# Altium PCB RobotCtrl_Core.PcbDoc
Units mm, origin at the board's own origin, x right, y up, seen from the top; angles counter-clockwise.
Board outline 47.75 x 39.24 mm, 4 copper layers (Top Layer, Layer 2, GND2, Bottom Layer), stack 0.603 mm thick; 48 components, 126 nets, 368 pads, 30 vias.
Unrouted connection lines stored in the file: 237.
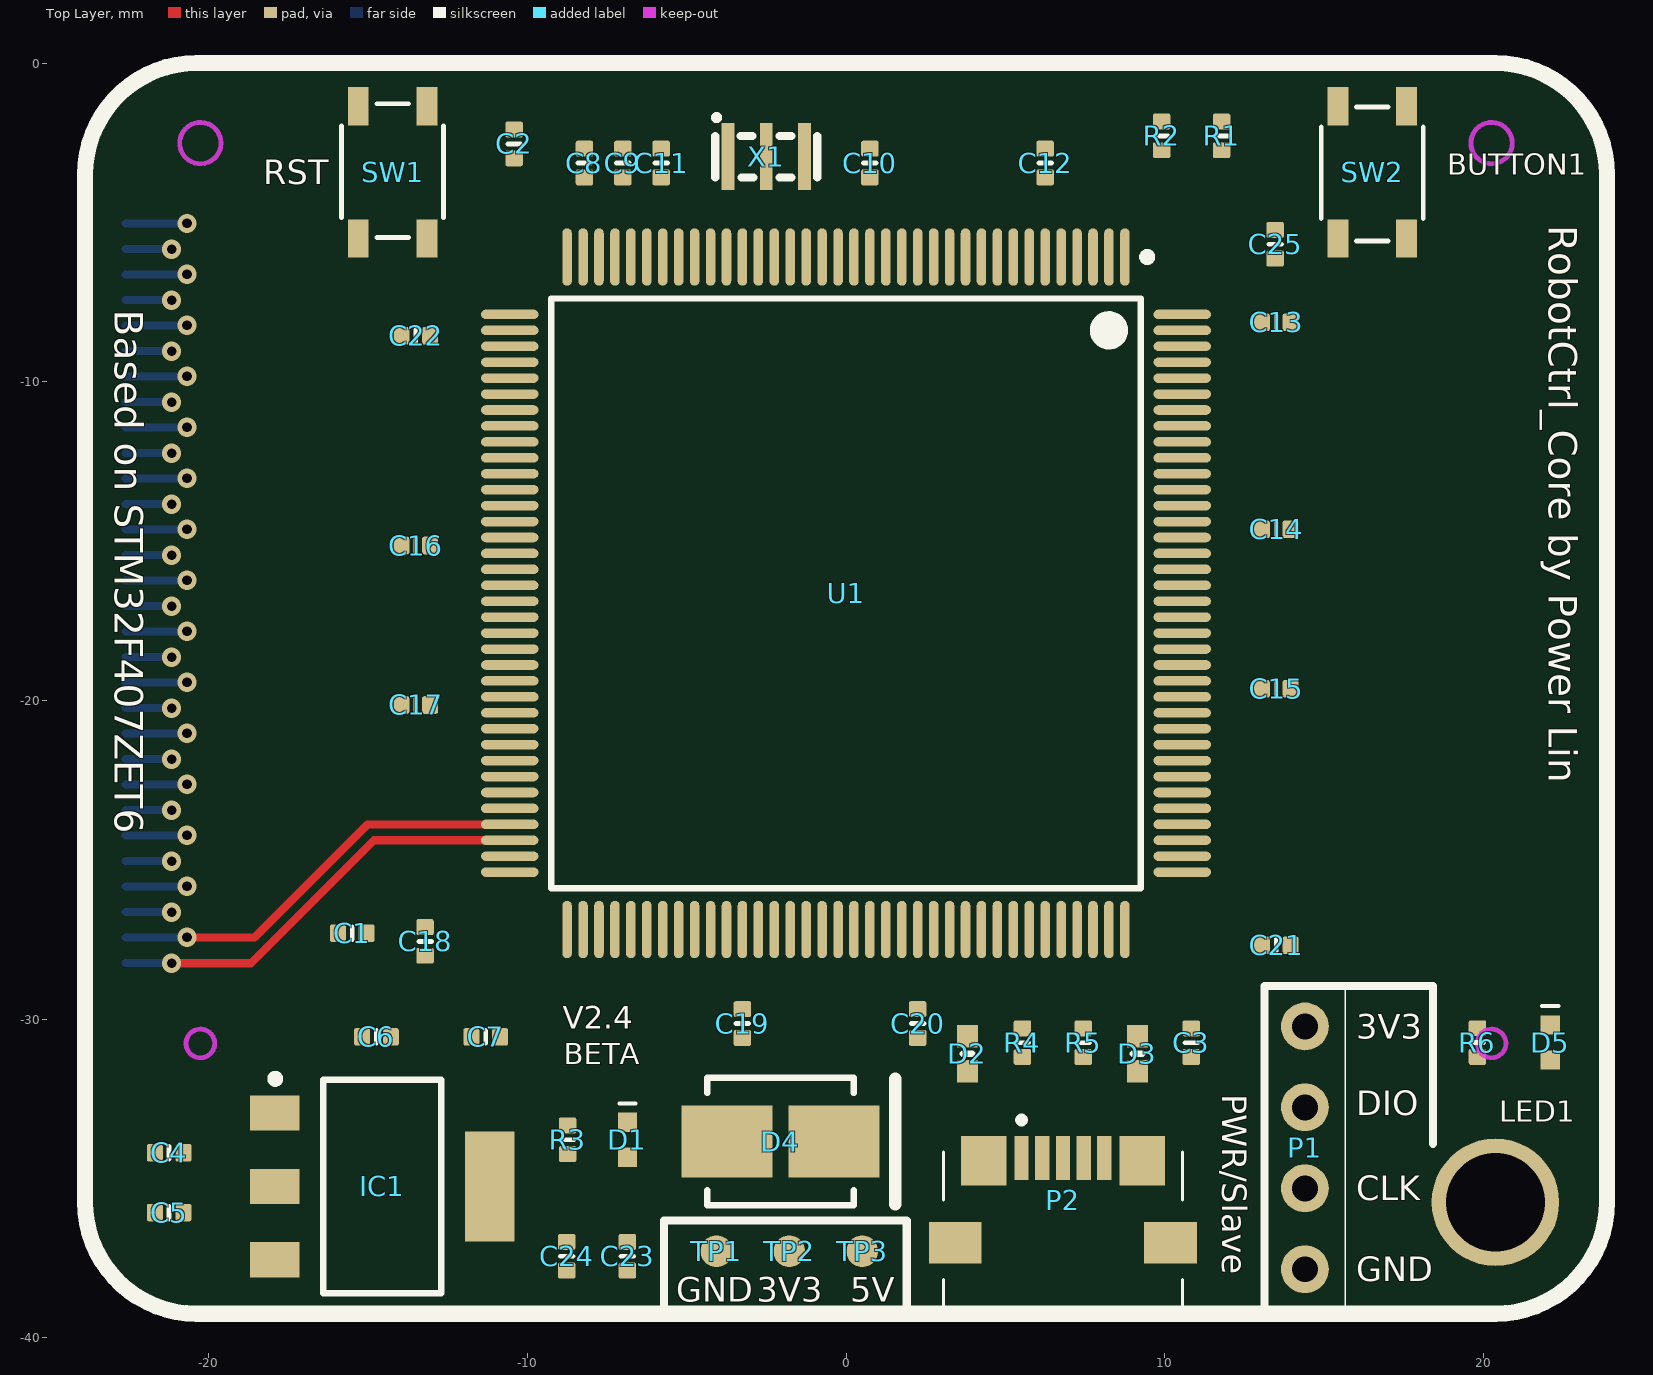
[diagram p0: Top Layer view]
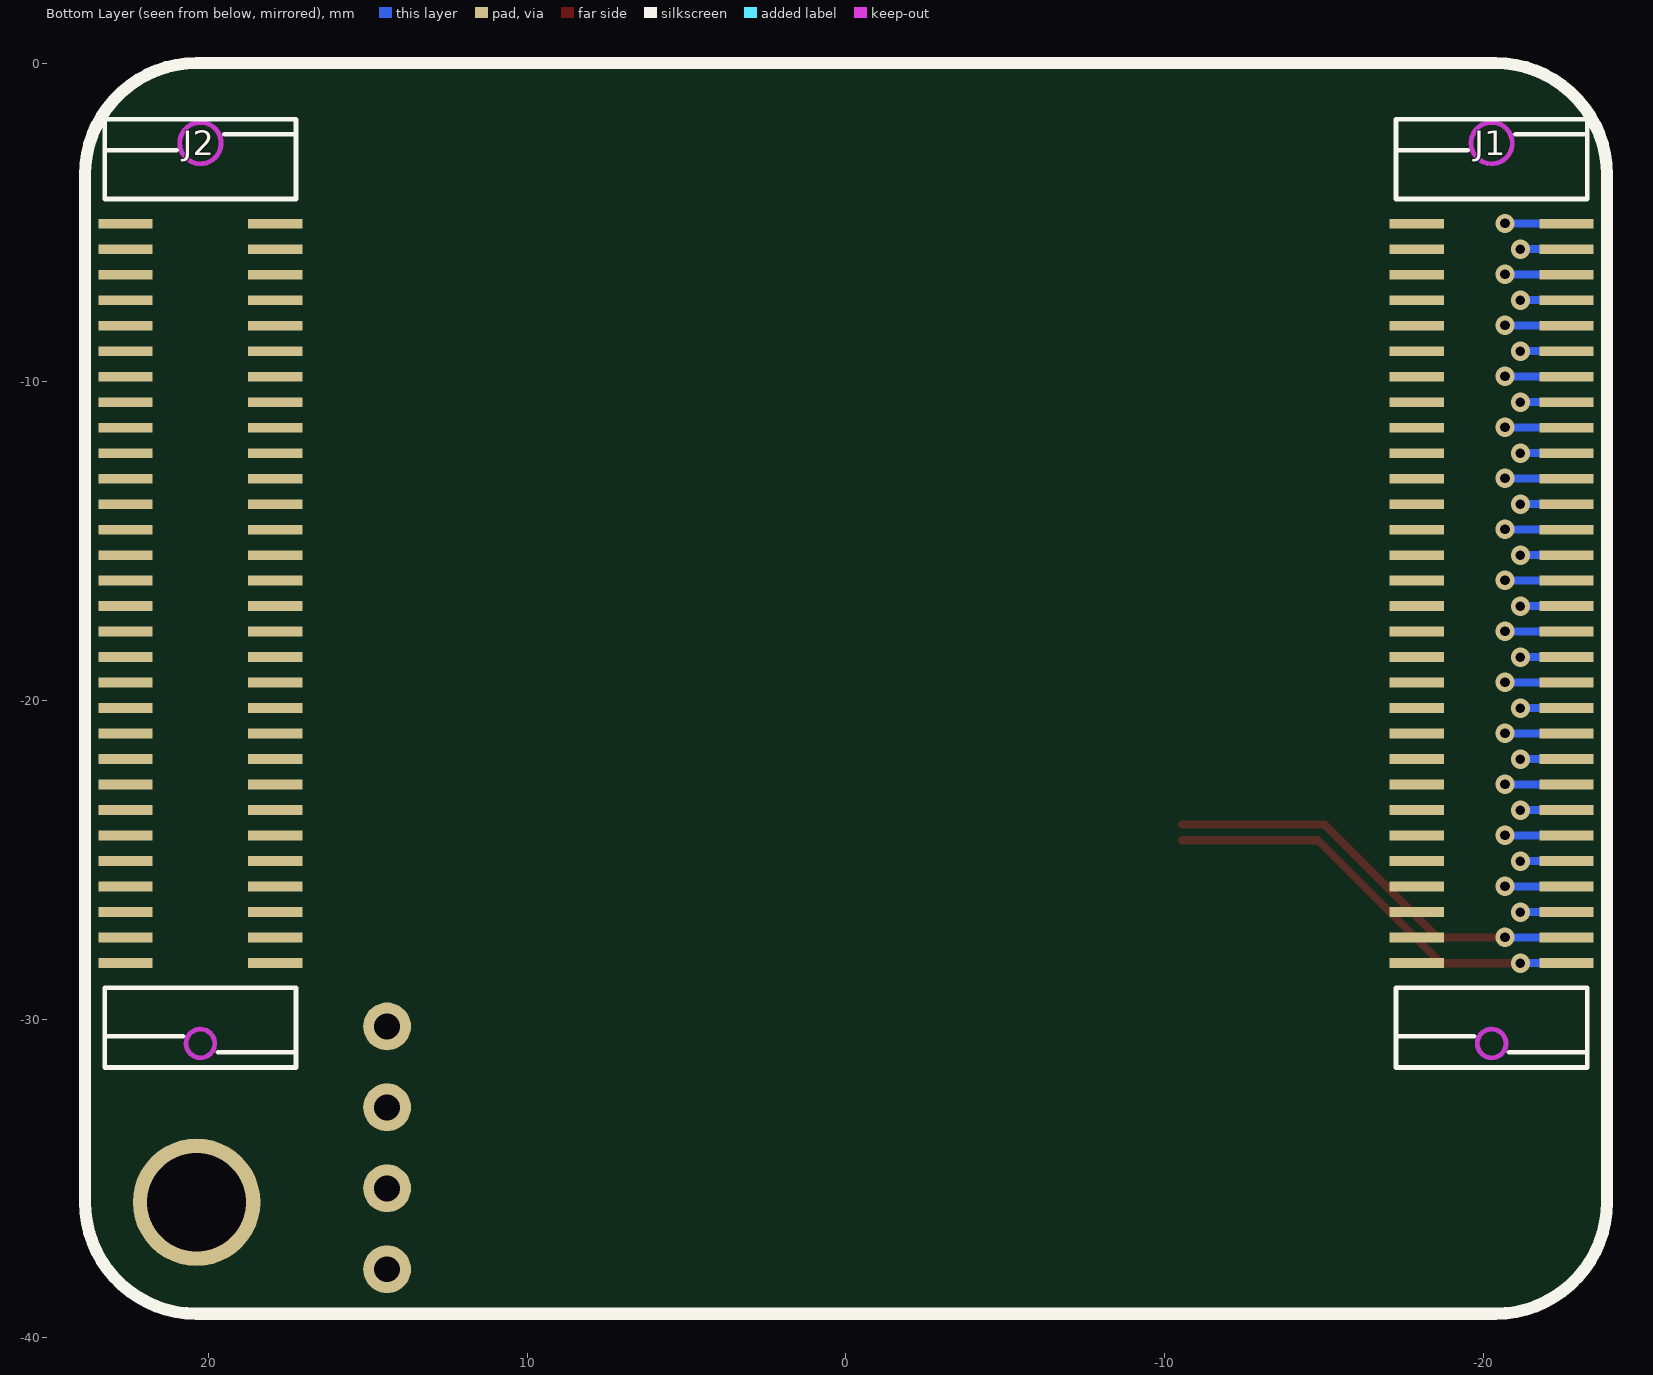
[diagram p1: Bottom Layer view, seen from below]

## Layer stack, top to bottom
Top Solder: solder mask 0.0102, Solder Resist, Dk 3.5
Top Layer: signal copper 0.0356
Dielectric 2: prepreg 0.0711, PP-006, Dk 4.1
Layer 2: signal copper 0.035
Dielectric 1: dielectric 0.32, FR-4, Dk 4.8
GND2: signal copper 0.035
Dielectric 3: prepreg 0.0711, PP-006, Dk 4.1
Bottom Layer: signal copper 0.0356
Bottom Solder: solder mask 0.0102, Solder Resist, Dk 3.5

## Board outline
-20.376,-39.243 cw(c-20.376,-35.743) -23.876,-35.743 -23.876,-3.5 cw(c-20.376,-3.5) -20.376,0 20.376,0 cw(c20.376,-3.5) 23.876,-3.5 23.876,-35.743 cw(c20.376,-35.743) 20.376,-39.243

## Design rules (kind name [scope] priority, off if disabled: settings)
Clearance [All] p1: gap=0.254 ignorepadtopadclearanceinfootprint=FALSE except(0: Arc-Hole Track-Hole SMDPad-Hole THPad-Hole Via-Hole Fill-Hole Poly-Hole Region-Hole Text-Hole; 0.051: Arc-SMDPad Track-SMDPad SMDPad-SMDPad; 0.244: Arc-Arc Arc-Track Track-Track)
PlaneConnect [All] p1: planeconnectstyle=Direct reliefexpansion=0.508 reliefentries=4 reliefconductorwidth=0.254 reliefairgap=0.254
PolygonConnect [All] p1: connectstyle=Direct reliefconductorwidth=0.254 reliefentries=4 polygonreliefangle="90 Angle" airgapwidth=0.254
RoutingVias [All] p1: holewidth=0.3 width=0.6 viastyle="Through Hole" minholewidth=0.3 minwidth=0.6 maxholewidth=0.3 maxwidth=0.6
SolderMaskExpansion [All] p1: expansion=0.102 istentingtop=FALSE
Width [All] p1: maxlimit=2.54 minlimit=0.152 preferedwidth=0.254
29 further rules are at their usual default settings.

## Components (designator, comment, footprint, x,y, rotation, side; value= is the part's Value field where it differs from the comment)
C1 "2.2uF@16V" CAP-0402 -15.494,-27.305 r0 top
C2 "100nF@16V" CAP-0402 -10.414,-2.54 r90 top
C3 "2.2uF@16V" CAP-0402 10.834,-30.737 r270 top
C4 "10uF@10V" CAP-0402 -21.237,-34.191 r0 top
C5 "100nF@16V" CAP-0402 -21.237,-36.068 r0 top
C6 "100nF@16V" CAP-0402 -14.732,-30.556 r0 top
C7 "10uF@10V" CAP-0402 -11.303,-30.556 r180 top
C8 "1uF@16V" CAP-0402 -8.206,-3.138 r270 top
C9 "100nF@16V" CAP-0402 -7.001,-3.138 r270 top
C10 "10uF@10V" CAP-0402 0.75,-3.138 r270 top
C11 "100nF@16V" CAP-0402 -5.797,-3.138 r270 top
C12 "100nF@16V" CAP-0402 6.25,-3.138 r270 top
C13 "100nF@16V" CAP-0402 13.499,-8.136 r180 top
C14 "100nF@16V" CAP-0402 13.499,-14.63 r180 top
C15 "100nF@16V" CAP-0402 13.499,-19.634 r180 top
C16 "100nF@16V" CAP-0402 -13.499,-15.138 r0 top
C17 "100nF@16V" CAP-0402 -13.499,-20.142 r0 top
C18 "100nF@16V" CAP-0402 -13.208,-27.559 r90 top
C19 "100nF@16V" CAP-0402 -3.25,-30.136 r90 top
C20 "100nF@16V" CAP-0402 2.25,-30.136 r90 top
C21 "100nF@16V" CAP-0402 13.499,-27.686 r180 top
C22 "100nF@16V" CAP-0402 -13.499,-8.56 r0 top
C23 "10uF@10V" CAP-0402 -6.858,-37.437 r270 top
C24 "100nF@16V" CAP-0402 -8.763,-37.437 r270 top
C25 "100nF@16V" CAP-0402 13.462,-5.687 r270 top
D1 "RED" LED-0402 -6.858,-33.782 r90 top
D2 "PESD0402-140" D-0402 3.81,-31.084 r90 top
D3 "PESD0402-140" D-0402 9.144,-31.084 r90 top
D4 "SMBJ5.0CA" DO-214AA/SMB -2.056,-33.84 r180 top
D5 "RED" LED-0402 22.098,-30.734 r90 top
IC1 "AMS1117-3.3" SOT-223 -14.732,-35.857 r270 top
J1 "3710M060037G3FT01" 3710M060037G3FT01 -17.906,-28.237 r0 bottom locked
J2 "3710M060037G3FT01" 3710M060037G3FT01 22.606,-28.237 r0 bottom locked
P1 "HDR1x4_2.54" HDR1X4_2.54 14.4,-37.846 r180 top
P2 "MicroQTJ" USB-MICRO 6.807,-36.328 r0 top
R1 "10k" R-0402 11.783,-2.286 r270 top
R2 "120R" R-0402 9.906,-2.286 r270 top
R3 "4.7k" R-0402 -8.735,-33.782 r90 top
R4 "10R" R-0402 5.537,-30.737 r270 top
R5 "10R" R-0402 7.442,-30.737 r270 top
R6 "4.7k" R-0402 19.812,-30.734 r90 top
SW1 "KEY" KEY-4P-4.2*3.4*2.5 -14.224,-3.429 r270 top
SW2 "KEY" KEY-4P-4.2*3.4*2.5 16.51,-3.429 r90 top
TP1 "TestPoint" TestPoint -4.064,-37.28 r90 top
TP2 "TestPoint" TestPoint -1.778,-37.28 r90 top
TP3 "TestPoint" TestPoint 0.508,-37.28 r90 top
U1 "STM32F407ZET6" STM-LQFP144_N 0,-16.637 r270 top locked
X1 "8MHz" SMD3213-3P -2.502,-2.939 r0 top

## Footprints (in the part's own frame and the unit in brackets; to place one, negate y for a bottom-side part, rotate by r counter-clockwise, add the part's x,y. Pads: shape width x height; smd on the part's side, far side on the other; paste and mask are expansions set on the pad)
3710M060037G3FT01 [mm]
  rect 1.7x0.3 smd: 1(-4.7,0) 2(-4.7,-0.8) 3(-4.7,-1.6) 4(-4.7,-2.4) 5(-4.7,-3.2) 6(-4.7,-4) 7(-4.7,-4.8) 8(-4.7,-5.6) 9(-4.7,-6.4) 10(-4.7,-7.2) 11(-4.7,-8) 12(-4.7,-8.8) 13(-4.7,-9.6) 14(-4.7,-10.4) 15(-4.7,-11.2) 16(-4.7,-12) 17(-4.7,-12.8) 18(-4.7,-13.6) 19(-4.7,-14.4) 20(-4.7,-15.2) 21(-4.7,-16) 22(-4.7,-16.8) 23(-4.7,-17.6) 24(-4.7,-18.4) 25(-4.7,-19.2) 26(-4.7,-20) 27(-4.7,-20.8) 28(-4.7,-21.6) 29(-4.7,-22.4) 30(-4.7,-23.2) 31(0,-23.2) 32(0,-22.4) 33(0,-21.6) 34(0,-20.8) 35(0,-20) 36(0,-19.2) 37(0,-18.4) 38(0,-17.6) 39(0,-16.8) 40(0,-16) 41(0,-15.2) 42(0,-14.4) 43(0,-13.6) 44(0,-12.8) 45(0,-12) 46(0,-11.2) 47(0,-10.4) 48(0,-9.6) 49(0,-8.8) 50(0,-8) 51(0,-7.2) 52(0,-6.4) 53(0,-5.6) 54(0,-4.8) 55(0,-4) 56(0,-3.2) 57(0,-2.4) 58(0,-1.6) 59(0,-0.8) 60(0,0)
  Keep-Out Layer circle w0.152: c-2.35,2.525 r0.45
  Keep-Out Layer circle w0.152: c-2.35,-25.725 r0.65
  silkscreen extent -5.35,-26.47 0.65,3.27
CAP-0402 [mm]
  rrect25% 0.5x0.55 smd: 1(-0.45,0) 2(0.45,0)
  silkscreen extent 0,-0.2 0,0.2, body extent -0.5,-0.25 0.5,0.25, height 0.6
D-0402 [mm]
  rect 0.7x0.65 smd: 1(-0.55,0) 2(0.55,0)
  silkscreen extent 0,-0.15 0,0.15, body extent -0.5,-0.25 0.5,0.25, height 0.43
DO-214AA/SMB [mm]
  rect 2.85x2.25 smd: 1(1.675,0) 2(-1.675,0)
  silkscreen extent -3.6,-2 2.3,2, body extent -2.5,-1.97 2.5,1.97, height 2.44
HDR1X4_2.54 [mm]
  round 1.5 hole 0.813: 1(0,0) 2(0,-2.54) 3(0,-5.08) 4(0,-7.62)
  silkscreen extent -1.27,-8.89 1.27,1.27
KEY-4P-4.2*3.4*2.5 [mm] "SKRPABE010"
  rect 1.2x0.65 smd: 1(-2.075,1.075) 1(2.075,1.075) 2(-2.075,-1.075) 2(2.075,-1.075)
  silkscreen extent -2.15,-1.6 2.05,1.6, body extent -2.35,-1.6 2.25,1.6, height 2.5
LED-0402 [mm]
  rect 0.6x0.6 smd: 1(-0.55,0) 2(0.55,0)
  silkscreen extent 1.14,-0.25 1.14,0.25, body extent -0.5,-0.25 0.5,0.25, height 0.5
R-0402 [mm]
  rrect25% 0.5x0.55 smd: 1(-0.45,0) 2(0.45,0)
  silkscreen extent 0,-0.2 0,0.2, body extent -0.5,-0.25 0.5,0.25, height 0.3
SMD3213-3P [mm]
  rect 0.4x2.1 smd: 1(-1.2,0) 2(0,0) 3(1.2,0)
  silkscreen extent -1.6,-0.65 1.6,1.27, body extent -1.6,-0.65 1.6,0.65, height 0.7
SOT-223 [mm]
  rect 1.1x1.55 smd: 1(-2.91,-3.197) 2(-0.61,-3.197) 3(1.69,-3.197)
  rect 3.45x1.55 smd: 4(-0.61,3.553)
  silkscreen extent -4.11,-3.3 2.74,2.03, body extent -3.88,-3.38 2.62,3.58, height 1.7
STM-LQFP144_N [mm] "Thin QFP, 144-Leads, Body 20x20mm, Pitch 0.5mm, IPC Medium Density"
  oval 1.8x0.3 smd: 1(-10.55,8.75) 2(-10.55,8.25) 3(-10.55,7.75) 4(-10.55,7.25) 5(-10.55,6.75) 6(-10.55,6.25) 7(-10.55,5.75) 8(-10.55,5.25) 9(-10.55,4.75) 10(-10.55,4.25) 11(-10.55,3.75) 12(-10.55,3.25) 13(-10.55,2.75) 14(-10.55,2.25) 15(-10.55,1.75) 16(-10.55,1.25) 17(-10.55,0.75) 18(-10.55,0.25) 19(-10.55,-0.25) 20(-10.55,-0.75) 21(-10.55,-1.25) 22(-10.55,-1.75) 23(-10.55,-2.25) 24(-10.55,-2.75) 25(-10.55,-3.25) 26(-10.55,-3.75) 27(-10.55,-4.25) 28(-10.55,-4.75) 29(-10.55,-5.25) 30(-10.55,-5.75) 31(-10.55,-6.25) 32(-10.55,-6.75) 33(-10.55,-7.25) 34(-10.55,-7.75) 35(-10.55,-8.25) 36(-10.55,-8.75) 73(10.55,-8.75) 74(10.55,-8.25) 75(10.55,-7.75) 76(10.55,-7.25) 77(10.55,-6.75) 78(10.55,-6.25) 79(10.55,-5.75) 80(10.55,-5.25) 81(10.55,-4.75) 82(10.55,-4.25) 83(10.55,-3.75) 84(10.55,-3.25) 85(10.55,-2.75) 86(10.55,-2.25) 87(10.55,-1.75) 88(10.55,-1.25) 89(10.55,-0.75) 90(10.55,-0.25) 91(10.55,0.25) 92(10.55,0.75) 93(10.55,1.25) 94(10.55,1.75) 95(10.55,2.25) 96(10.55,2.75) 97(10.55,3.25) 98(10.55,3.75) 99(10.55,4.25) 100(10.55,4.75) 101(10.55,5.25) 102(10.55,5.75) 103(10.55,6.25) 104(10.55,6.75) 105(10.55,7.25) 106(10.55,7.75) 107(10.55,8.25) 108(10.55,8.75)
  oval 0.3x1.8 smd: 37(-8.75,-10.55) 38(-8.25,-10.55) 39(-7.75,-10.55) 40(-7.25,-10.55) 41(-6.75,-10.55) 42(-6.25,-10.55) 43(-5.75,-10.55) 44(-5.25,-10.55) 45(-4.75,-10.55) 46(-4.25,-10.55) 47(-3.75,-10.55) 48(-3.25,-10.55) 49(-2.75,-10.55) 50(-2.25,-10.55) 51(-1.75,-10.55) 52(-1.25,-10.55) 53(-0.75,-10.55) 54(-0.25,-10.55) 55(0.25,-10.55) 56(0.75,-10.55) 57(1.25,-10.55) 58(1.75,-10.55) 59(2.25,-10.55) 60(2.75,-10.55) 61(3.25,-10.55) 62(3.75,-10.55) 63(4.25,-10.55) 64(4.75,-10.55) 65(5.25,-10.55) 66(5.75,-10.55) 67(6.25,-10.55) 68(6.75,-10.55) 69(7.25,-10.55) 70(7.75,-10.55) 71(8.25,-10.55) 72(8.75,-10.55) 109(8.75,10.55) 110(8.25,10.55) 111(7.75,10.55) 112(7.25,10.55) 113(6.75,10.55) 114(6.25,10.55) 115(5.75,10.55) 116(5.25,10.55) 117(4.75,10.55) 118(4.25,10.55) 119(3.75,10.55) 120(3.25,10.55) 121(2.75,10.55) 122(2.25,10.55) 123(1.75,10.55) 124(1.25,10.55) 125(0.75,10.55) 126(0.25,10.55) 127(-0.25,10.55) 128(-0.75,10.55) 129(-1.25,10.55) 130(-1.75,10.55) 131(-2.25,10.55) 132(-2.75,10.55) 133(-3.25,10.55) 134(-3.75,10.55) 135(-4.25,10.55) 136(-4.75,10.55) 137(-5.25,10.55) 138(-5.75,10.55) 139(-6.25,10.55) 140(-6.75,10.55) 141(-7.25,10.55) 142(-7.75,10.55) 143(-8.25,10.55) 144(-8.75,10.55)
  silkscreen extent -10.67,-9.25 9.25,9.58, body extent -10,-10 10,10, height 1.6
TestPoint [mm]
  round 1 smd: 1(0,0)
USB-MICRO [mm]
  rect 0.45x1.38 smd: 1(-1.3,1.975) 2(-0.65,1.975) 3(0,1.975) 4(0.65,1.975) 5(1.3,1.975)
  rect 1.65x1.3 smd: EH(-3.375,-0.685) EH(3.375,-0.685)
  rect 1.425x1.55 smd: EH(-2.487,1.89) EH(2.487,1.89)
  silkscreen extent -3.75,-2.84 3.75,3.26, body extent -3.9,-2.5 3.9,2.5, height 2.72

## Part data
C1 C3: library part CAP, "(CC0402KRX5R7BB225)", Package=0402, SuppliersPartNumber=C52923, ComponentLink1Description=供应商链接, ComponentLink1URL=http://www.szlcsc.com/product/details_53938.html, Supplier=LC
C2 C5 C6 C9 C11 C12 C13 C14 C15 C16 C17 C18 C19 C20 C21 C22 C24 C25: library part CAP, "(CC0402JRX7R7BB104)", Package=0402, SuppliersPartNumber=C52923, ComponentLink1Description=供应商链接, ComponentLink1URL=http://www.szlcsc.com/product/details_53938.html, Supplier=LC
C4 C7 C10 C23: library part CAP, "(CC0402MRX5R6BB106)", Package=0402, SuppliersPartNumber=C52923, ComponentLink1Description=供应商链接, ComponentLink1URL=http://www.szlcsc.com/product/details_53938.html, Supplier=LC
C8: library part CAP, "(CC0402KRX5R7BB105)", Package=0402, SuppliersPartNumber=C52923, ComponentLink1Description=供应商链接, ComponentLink1URL=http://www.szlcsc.com/product/details_53938.html, Supplier=LC
D1 D5: library part LED, "发光二极管", Package=0603, SuppliersPartNumber=C2290, ComponentLink1Description=供应商链接, ComponentLink1URL=http://www.szlcsc.com/product/details_2663.html, Supplier=LC
D2 D3: library part TVS_C
D4: library part TVS_C, "Brightking / MDD"
IC1: library part AMS1117, "AMS1117-3.3 1.0A", Manufacturer_Name=Nexperia, Manufacturer_Part_Number=SI2302DS, Mouser Part Number=N/A, RS Part Number=7983053P, Datasheet Link=https://assets.nexperia.com/documents/data-sheet/SI2302DS.pdf, Height=1.1mm, Mouser Price/Stock=https://www.mouser.com/Search/Refine.aspx?Keyword=N%2FA, RS Price/Stock=http://uk.rs-online.com/web/p/products/7983053P
J1 J2: library part 3710M/F, "B2B Connector", System=Connector
P1: "Header"
P2: library part USB_MICRO, "USB_MICRO"
R1 R2 R3 R4 R5 R6: library part RES, "贴片电阻", Package=0805, SuppliersPartNumber=C17798, Supplier=LC
SW1 SW2: "按键开关"
TP1 TP2 TP3: "测试点"
U1: "ARM Cortex-M4 32-bit MCU+FPU, 210 DMIPS, 512 kB Flash, 192 kB Internal RAM, 114 I/Os, 144-pin LQFP, -40 to 85 degC, Tray", I/Os (High Current)=114, Manufacturer=STMicroelectronics, Operating Frequency(F) (Processor speed) (MHz)=168, Supplier Part Number 1=497-11903-ND, Supply Voltage(Vcc) max (V)=3.6, Supply Voltage(Vcc) min (V)=1.8, ComponentLink1Description="Manufacturer URL", ComponentLink1URL=http://www.st.com/web/en/home.html, ComponentLink2Description=Datasheet, ComponentLink2URL=http://www.st.com/st-web-ui/static/active/en/resource/technical/document/datasheet/DM00037051.pdf, ComponentLink3Description="Package Specification", ComponentLink3URL=http://www.st.com/st-web-ui/static/active/en/resource/technical/document/datasheet/DM00037051.pdf, Core="ARM Cortex-M4", D/A Converter=2x12-bit, DatasheetVersion="Rev. 4", FLASH Size (Prog) (kB)=512, Internal RAM Size (kB)=192, Mounting Technology="Surface Mount", PackageDescription="144-Pin Low Profile Quad Flat Package, 20 x 20 mm Body, 0.5 mm Pitch", PackageReference=LQFP144, PackageVersion="Rev. 4, 06/2013", Packing=Tray, PartNumber=STM32F407ZET6, Supplier 1=Digi-Key, Supplier 2=Farnell, Supplier 3=Newark, Supplier 4=Newark, Supplier 5=Mouser, Supplier Part Number 2=2215229, Supplier Part Number 3=46W2203, Supplier Part Number 4=87T3795, Supplier Part Number 5=511-STM32F407ZET6
X1: library part XTAL, "CSTCE8M00G15C99-R0"

## Free pads (board coordinates)
  round 4 hole 3.1: 2(20.376,-35.743)

## Via types
v1: diameter 0.6, hole 0.3, Top Layer to Bottom Layer, 30 vias

## Nets (pads, with @x,y where several pads share a name; then routed paths per layer and width w, separated by ;. In a path a pad name is that pad's centre, name@x,y a point inside that pad or via, vN(x,y) a via of type N, cw(c..) or ccw(c..) an arc to the next point about the centre after c; other vN are vias at no path point)
GND: C1.1 C2.1 C3.1 C4.1 C5.1 C6.1 C7.1 C8.1 C9.1 C10.1 C11.1 C12.1 C13.1 C14.1 C15.1 C16.1 C17.1 C18.1 C19.1 C20.1 C21.1 C22.1 C23.1 C24.1 C25.1 D1.2 D2.1 D3.1 D4.1 D5.2 IC1.1 J1.29 J1.30 J2.30 J2.31 P1.1 P2.5 P2.EH R1.1 SW1.2 SW2.2 TP3.1 U1.16 U1.31 U1.38 U1.51 U1.61 U1.83 U1.94 U1.107 U1.120 U1.130 X1.2 | length 3.4
  Bottom Layer w0.254: J1.30@-22.603,-5.035 -22.602,-5.033 -20.68,-5.033 v1(-20.676,-5.029) ; J1.29@-22.602,-5.841 -21.162,-5.841 v1(-21.158,-5.845)
NetC1_2: C1.2 U1.71
NetC2_2: C2.2 SW1.1 U1.25
NetC3_2: C3.2 U1.106
NetD1_A: D1.1 R3.1
NetD5_A: D5.1 R6.1
NetP2_2: P2.2 R4.2
NetP2_3: P2.3 R5.2
NetR1_2: R1.2 U1.138
NetR2_2: R2.2 U1.143
NetU1_23: U1.23 X1.3
NetU1_24: U1.24 X1.1
PA0: J1.54 U1.34
PA1: J1.55 U1.35
PA2: J1.56 U1.36
PA3: J1.28 U1.37 | length 1.9
  Bottom Layer w0.254: J1.28@-22.603,-6.635 -22.602,-6.633 -20.68,-6.633 v1(-20.676,-6.629)
PA4: J1.27 U1.40 | length 1.4
  Bottom Layer w0.254: J1.27@-22.602,-7.441 -21.162,-7.441 v1(-21.158,-7.445)
PA5: J1.26 U1.41 | length 1.9
  Bottom Layer w0.254: J1.26@-22.603,-8.235 -22.602,-8.233 -20.68,-8.233 v1(-20.676,-8.229)
PA6: J1.25 U1.42 | length 1.4
  Bottom Layer w0.254: J1.25@-22.602,-9.041 -21.162,-9.041 v1(-21.158,-9.045)
PA7: J1.24 U1.43 | length 1.9
  Bottom Layer w0.254: J1.24@-22.603,-9.835 -22.602,-9.833 -20.68,-9.833 v1(-20.676,-9.829)
PA8: J2.24 U1.100
PA9: J2.25 U1.101
PA10: J2.26 U1.102
PA11: D2.2 J2.27 R4.1 U1.103
PA12: D3.2 J2.28 R5.1 U1.104
PA13: C25.2 J2.29 P1.3 SW2.1 U1.105
PA14: J2.60 P1.2 R6.2 U1.109
PA15: J2.59 U1.110
PB0: J1.21 U1.46 | length 1.4
  Bottom Layer w0.254: J1.21@-22.602,-12.241 -21.162,-12.241 v1(-21.158,-12.245)
PB1: J1.20 U1.47 | length 1.9
  Bottom Layer w0.254: J1.20@-22.603,-13.035 -22.602,-13.033 -20.68,-13.033 v1(-20.676,-13.029)
PB2: J1.19 U1.48 | length 1.4
  Bottom Layer w0.254: J1.19@-22.602,-13.841 -21.162,-13.841 v1(-21.158,-13.845)
PB3: J2.40 U1.133
PB4: J2.39 U1.134
PB5: J2.38 U1.135
PB6: J2.37 U1.136
PB7: J2.36 U1.137
PB8: J2.35 U1.139
PB9: J2.34 U1.140
PB10: J1.2 U1.69 | length 13.5
  Top Layer w0.254: v1(-20.676,-27.429) -20.673,-27.432 -18.56,-27.432 -15.017,-23.889 -10.552,-23.889 U1.69
  Bottom Layer w0.254: J1.2@-22.603,-27.434 -22.602,-27.433 -20.68,-27.433 v1(-20.676,-27.429)
PB11: J1.1 U1.70 | length 13.7
  Top Layer w0.254: v1(-21.158,-28.245) -18.669,-28.245 -14.811,-24.387 U1.70
  Bottom Layer w0.254: J1.1@-22.602,-28.241 -21.162,-28.241 v1(-21.158,-28.245)
PB12: J2.1 U1.73
PB13: J2.2 U1.74
PB14: J2.3 U1.75
PB15: J2.4 U1.76
PC0: J1.50 U1.26
PC1: J1.51 U1.27
PC2: J1.52 U1.28
PC3: J1.53 U1.29
PC4: J1.23 U1.44 | length 1.4
  Bottom Layer w0.254: J1.23@-22.602,-10.641 -21.162,-10.641 v1(-21.158,-10.645)
PC5: J1.22 U1.45 | length 1.9
  Bottom Layer w0.254: J1.22@-22.603,-11.435 -22.602,-11.433 -20.68,-11.433 v1(-20.676,-11.429)
PC6: J2.20 U1.96
PC7: J2.21 U1.97
PC8: J2.22 U1.98
PC9: J2.23 U1.99
PC10: J2.58 U1.111
PC11: J2.57 U1.112
PC12: J2.56 U1.113
PC13: J1.36 U1.7
PC14: J1.37 U1.8
PC15: J1.38 U1.9
PD0: J2.55 U1.114
PD1: J2.54 U1.115
PD2: J2.53 U1.116
PD3: J2.52 U1.117
PD4: J2.51 U1.118
PD5: J2.50 U1.119
PD6: J2.49 U1.122
PD7: J2.48 U1.123
PD8: J2.5 U1.77
PD9: J2.6 U1.78
PD10: J2.7 U1.79
PD11: J2.8 U1.80
PD12: J2.9 U1.81
PD13: J2.10 U1.82
PD14: J2.11 U1.85
PD15: J2.12 U1.86
PE0: J2.33 U1.141
PE1: J2.32 U1.142
PE2: J1.31 U1.1
PE3: J1.32 U1.2
PE4: J1.33 U1.3
PE5: J1.34 U1.4
PE6: J1.35 U1.5
PE7: J1.11 U1.58 | length 1.4
  Bottom Layer w0.254: J1.11@-22.602,-20.241 -21.162,-20.241 v1(-21.158,-20.245)
PE8: J1.10 U1.59 | length 1.9
  Bottom Layer w0.254: J1.10@-22.603,-21.034 -22.602,-21.033 -20.68,-21.033 v1(-20.676,-21.029)
PE9: J1.9 U1.60 | length 1.4
  Bottom Layer w0.254: J1.9@-22.602,-21.841 -21.162,-21.841 v1(-21.158,-21.845)
PE10: J1.8 U1.63 | length 1.9
  Bottom Layer w0.254: J1.8@-22.603,-22.635 -22.602,-22.633 -20.68,-22.633 v1(-20.676,-22.629)
PE11: J1.7 U1.64 | length 1.4
  Bottom Layer w0.254: J1.7@-22.602,-23.441 -21.162,-23.441 v1(-21.158,-23.445)
PE12: J1.6 U1.65 | length 1.9
  Bottom Layer w0.254: J1.6@-22.603,-24.235 -22.602,-24.233 -20.68,-24.233 v1(-20.676,-24.229)
PE13: J1.5 U1.66 | length 1.4
  Bottom Layer w0.254: J1.5@-22.602,-25.041 -21.162,-25.041 v1(-21.158,-25.045)
PE14: J1.4 U1.67 | length 1.9
  Bottom Layer w0.254: J1.4@-22.603,-25.835 -22.602,-25.833 -20.68,-25.833 v1(-20.676,-25.829)
PE15: J1.3 U1.68 | length 1.4
  Bottom Layer w0.254: J1.3@-22.602,-26.641 -21.162,-26.641 v1(-21.158,-26.645)
PF0: J1.39 U1.10
PF1: J1.40 U1.11
PF2: J1.41 U1.12
PF3: J1.42 U1.13
PF4: J1.43 U1.14
PF5: J1.44 U1.15
PF6: J1.45 U1.18
PF7: J1.46 U1.19
PF8: J1.47 U1.20
PF9: J1.48 U1.21
PF10: J1.49 U1.22
PF11: J1.18 U1.49 | length 1.9
  Bottom Layer w0.254: J1.18@-22.603,-14.635 -22.602,-14.633 -20.68,-14.633 v1(-20.676,-14.629)
PF12: J1.17 U1.50 | length 1.4
  Bottom Layer w0.254: J1.17@-22.602,-15.441 -21.162,-15.441 v1(-21.158,-15.445)
PF13: J1.16 U1.53 | length 1.9
  Bottom Layer w0.254: J1.16@-22.603,-16.235 -22.602,-16.233 -20.68,-16.233 v1(-20.676,-16.229)
PF14: J1.15 U1.54 | length 1.4
  Bottom Layer w0.254: J1.15@-22.602,-17.041 -21.162,-17.041 v1(-21.158,-17.045)
PF15: J1.14 U1.55 | length 1.9
  Bottom Layer w0.254: J1.14@-22.603,-17.835 -22.602,-17.833 -20.68,-17.833 v1(-20.676,-17.829)
PG0: J1.13 U1.56 | length 1.4
  Bottom Layer w0.254: J1.13@-22.602,-18.641 -21.162,-18.641 v1(-21.158,-18.645)
PG1: J1.12 U1.57 | length 1.9
  Bottom Layer w0.254: J1.12@-22.603,-19.435 -22.602,-19.433 -20.68,-19.433 v1(-20.676,-19.429)
PG2: J2.13 U1.87
PG3: J2.14 U1.88
PG4: J2.15 U1.89
PG5: J2.16 U1.90
PG6: J2.17 U1.91
PG7: J2.18 U1.92
PG8: J2.19 U1.93
PG9: J2.47 U1.124
PG10: J2.46 U1.125
PG11: J2.45 U1.126
PG12: J2.44 U1.127
PG13: J2.43 U1.128
PG14: J2.42 U1.129
PG15: J2.41 U1.132
VBUS: C4.2 C5.2 C23.2 C24.2 D4.2 IC1.3 J1.59 J1.60 P2.1 TP1.1
VCC_3V3: C6.2 C7.2 C8.2 C9.2 C10.2 C11.2 C12.2 C13.2 C14.2 C15.2 C16.2 C17.2 C18.2 C19.2 C20.2 C21.2 C22.2 IC1.2 J1.57 J1.58 P1.4 R2.1 R3.2 TP2.1 U1.6 U1.17 U1.30 U1.32 U1.33 U1.39 U1.52 U1.62 U1.72 U1.84 U1.95 U1.108 U1.121 U1.131 U1.144
pads on no net: IC1.4 P2.4

## Silkscreen, mask and mechanical layers (free items; w line width, h text height)
Top Overlay:
  lines w0.254: -5.715,-39.243 -5.715,-36.322 1.905,-36.322 1.905,-39.243 ; 13.13,-39.116 13.13,-28.956 18.415,-28.956 18.415,-33.909
  lines w0.508: -23.876,-35.743 ccw(c-20.376,-35.743) -20.376,-39.243 3.048,-39.243 20.376,-39.243 ccw(c20.376,-35.743) 23.876,-35.743 23.876,-3.5 ccw(c20.376,-3.5) 20.376,0 -20.376,0 ccw(c-20.376,-3.5) -23.876,-3.5 -23.876,-22.352 -23.876,-35.743
  text "BUTTON1" at 18.864,-3.505 h0.66
  text "RST" at -18.288,-3.81 h0.76
  text "RobotCtrl_Core by Power Lin" at 22.056,-5.084 h0.89 r270
  text "Based on STM32F407ZET6" at -22.949,-7.746 h0.89 r270
  text "V2.4" at -8.89,-30.302 h0.71
  text "3V3" at 16.002,-30.607 h0.76
  text "BETA" at -8.856,-31.42 h0.66
  text "PWR/Slave" at 11.811,-32.36 h0.76 r270
  text "DIO" at 16.002,-33.02 h0.76
  text "LED1" at 20.49,-33.223 h0.66
  text "CLK" at 16.002,-35.687 h0.76
  text "GND" at 16.002,-38.227 h0.76
  text "GND" at -5.334,-38.862 h0.76
  text "3V3" at -2.794,-38.862 h0.76
  text "5V" at 0.127,-38.862 h0.76
Bottom Overlay:
  lines w0.381: -23.876,-35.743 ccw(c-20.376,-35.743) -20.376,-39.243 3.048,-39.243 20.376,-39.243 ccw(c20.376,-35.743) 23.876,-35.743 23.876,-3.5 ccw(c20.376,-3.5) 20.376,0 -20.376,0 ccw(c-20.376,-3.5) -23.876,-3.5 -23.876,-22.352 -23.876,-35.743
Mechanical 1:
  lines w0.254: -23.876,-35.743 ccw(c-20.376,-35.743) -20.376,-39.243 3.048,-39.243 20.376,-39.243 ccw(c20.376,-35.743) 23.876,-35.743 23.876,-3.5 ccw(c20.376,-3.5) 20.376,0 -20.376,0 ccw(c-20.376,-3.5) -23.876,-3.5 -23.876,-22.352 -23.876,-35.743